# Altium PCB PC110-itx.PcbDoc (part 6 of 16)
Units mm, origin at the board's own origin, x right, y up, seen from the top; angles counter-clockwise.
Board outline 170 x 170 mm, 16 copper layers (FC1, FC2, FC3, FC4, IP1, IC1, IC2, IP2, IP3, IC3, IC4, IP4, BC4, BC3, BC2, BC1), stack 3.903 mm thick; 935 components, 1357 nets, 4698 pads, 3240 vias.
Unrouted connection lines stored in the file: 552.
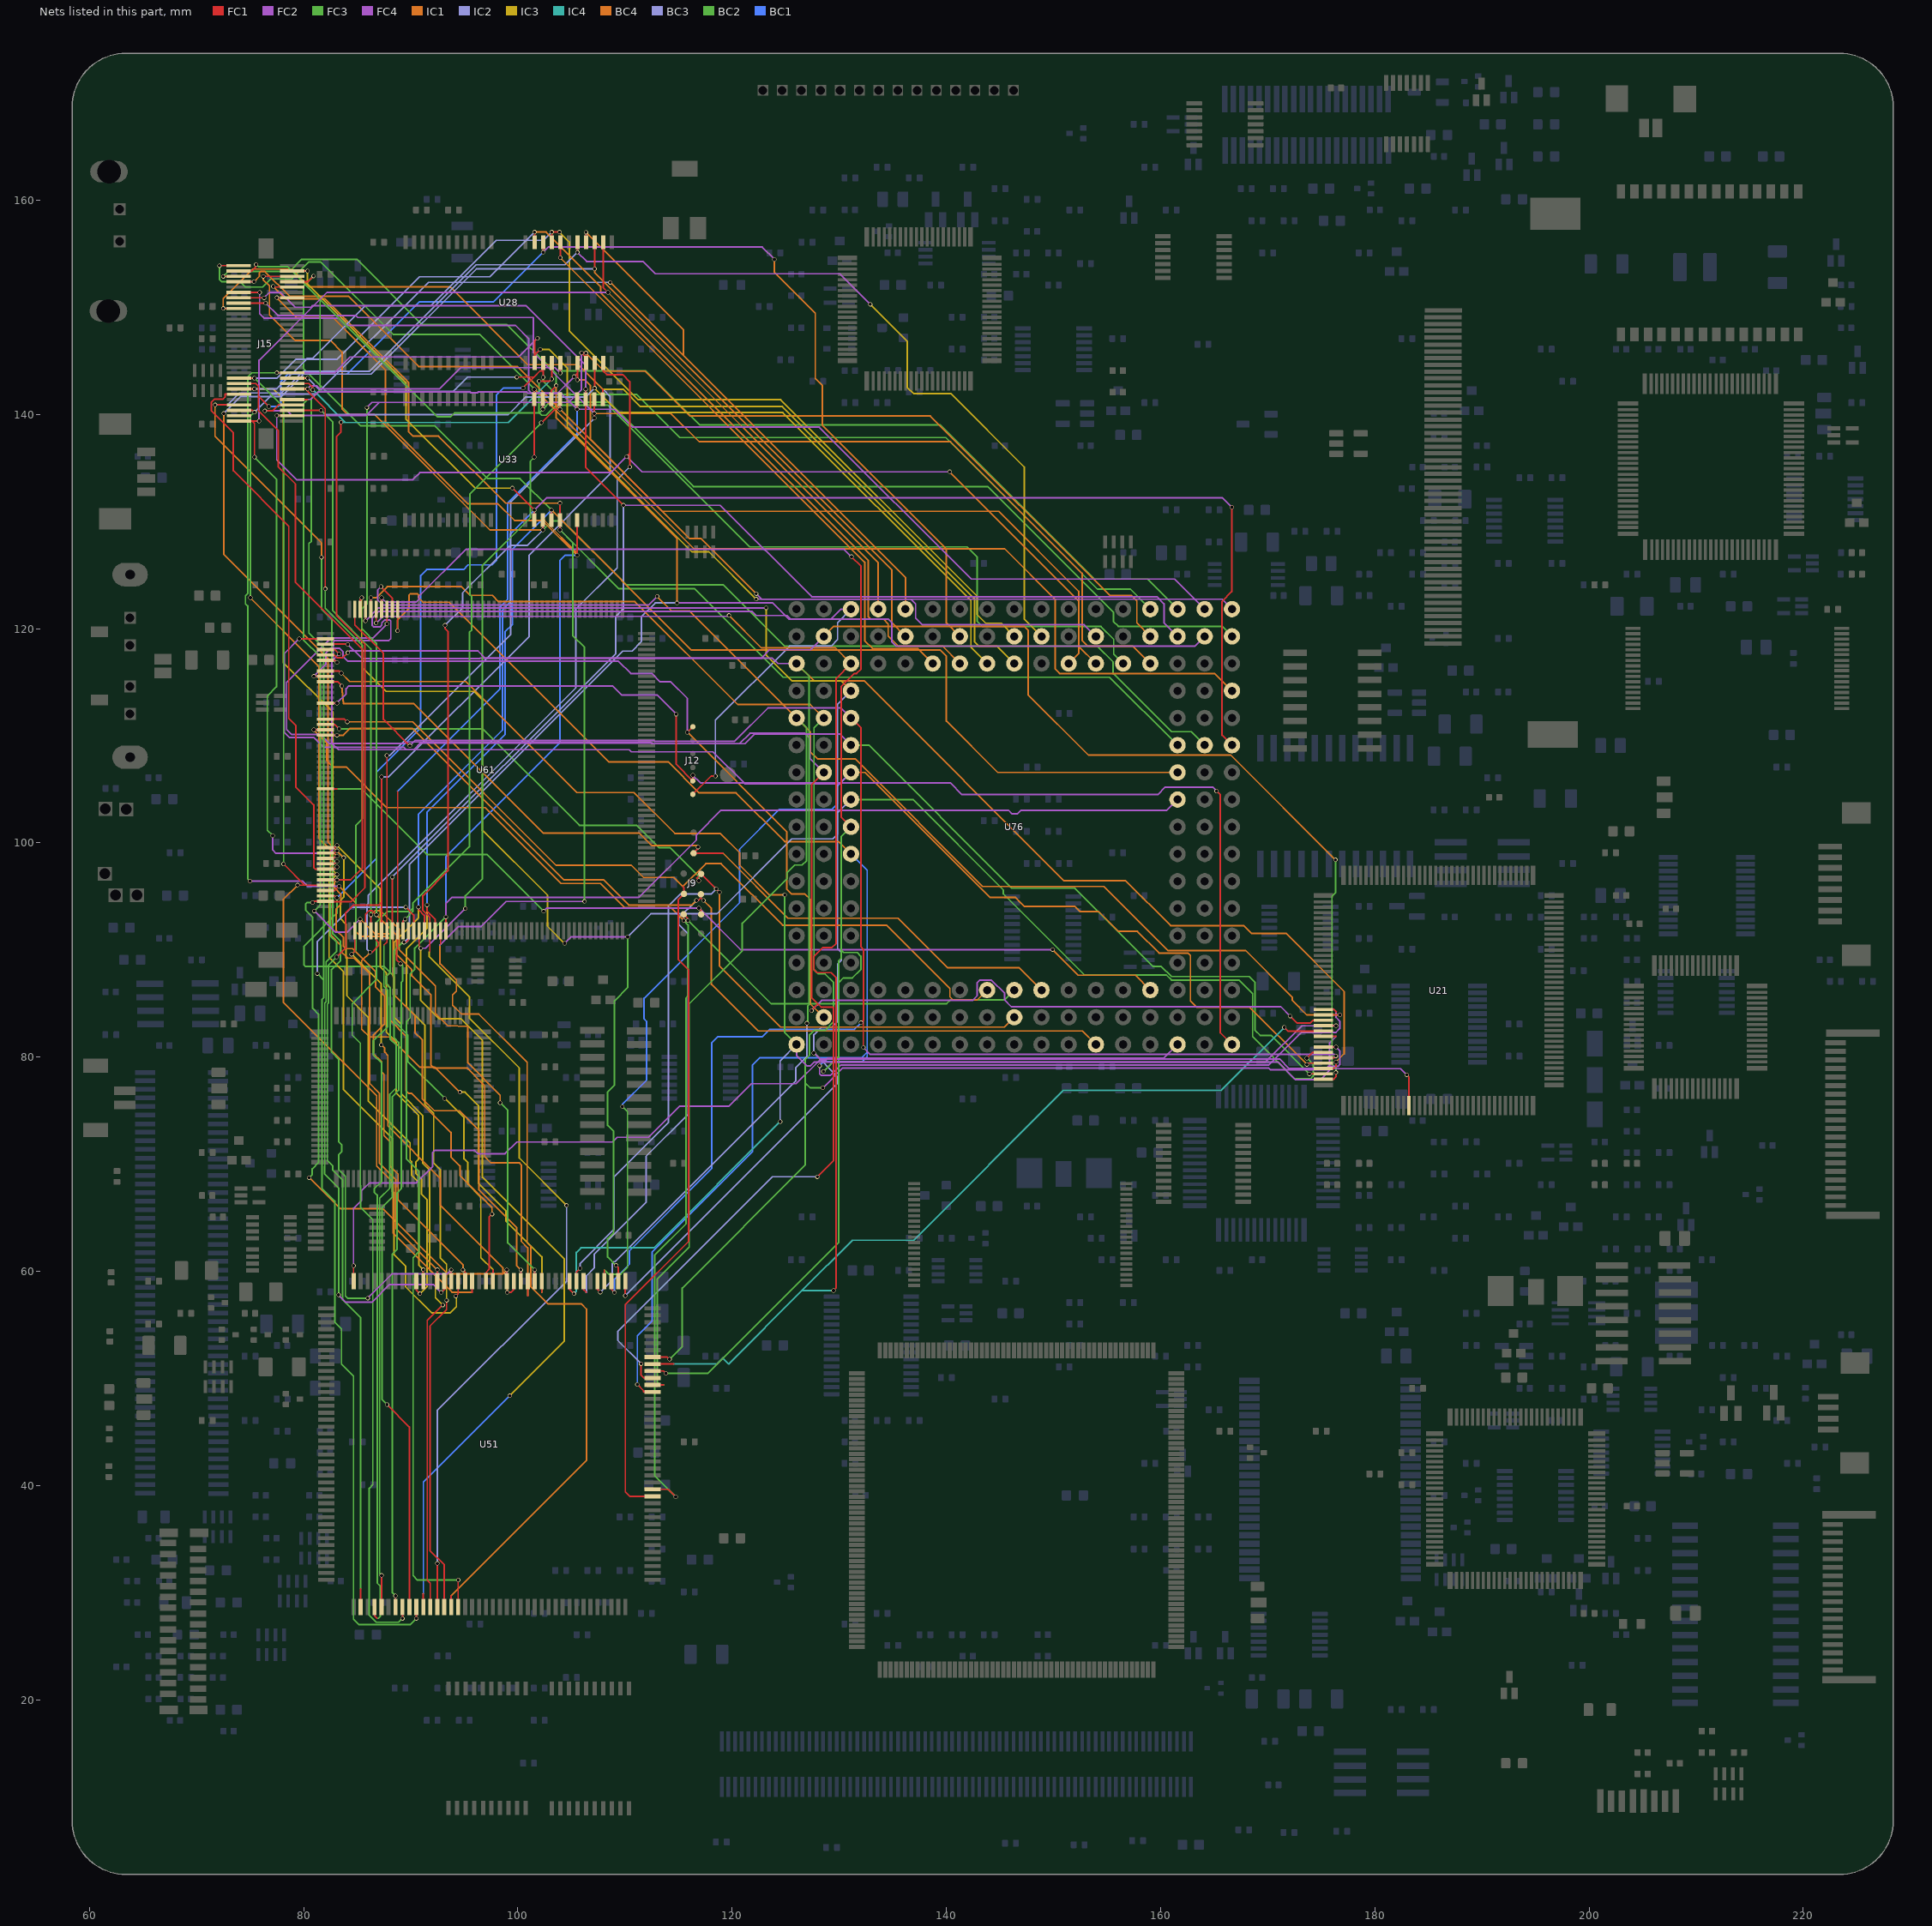
[diagram p19: the nets of this part, all layers, seen from the top]

## Via types
v1: diameter 0.4, hole 0.3, FC1 to BC1, 3240 vias

## Nets (pads, with @x,y where several pads share a name; then routed paths per layer and width w, separated by ;. In a path a pad name is that pad's centre, name@x,y a point inside that pad or via, vN(x,y) a via of type N, cw(c..) or ccw(c..) an arc to the next point about the centre after c; other vN are vias at no path point) (continued)
CPU_A13: U21.22 U51.148 U61.95 U76.Q10 | length 183.1
  FC1 w0.15: v1(88.773,119.812) 88.778,119.817 U61.95@88.778,121.807 ; v1(111.15,49.454) 111.735,48.87 111.735,48.755 U51.148@112.57,48.755 ; U21.22@175.209,84.456 176.199,84.456 176.403,84.252 176.378,84.226
  FC4 w0.15: v1(128.168,79.197) 128.168,78.435 128.295,78.308 129.21,78.308 130.175,79.273 170.098,79.273 173.146,82.321 176.378,82.321 176.733,82.677 176.733,83.363 176.378,83.718 176.378,84.226
  BC4 w0.15: v1(88.773,119.812) 88.773,120.828 89.836,121.891 89.836,123.136 89.941,123.241 90.632,123.241 90.734,123.139 90.734,122.88 91.143,122.471 93.582,122.471 108.484,107.569 114.035,107.569 116.931,104.673 120.371,104.673 124.914,100.13 129.94,100.13 U76.Q10@131.103,98.967
  BC1 w0.15: v1(111.15,49.454) 111.15,53.975 112.547,55.372 112.547,61.824 121.895,71.171 121.895,79.248 122.58,79.934 132.08,79.934 132.613,80.467 ; v1(128.168,79.197) 128.575,79.604 132.156,79.604 132.613,80.061 132.613,80.467 ; U76.Q10@131.103,98.967 132.613,97.457 132.613,80.467
CPU_A14: U21.23 U51.149 U61.96 U76.S5 | length 183.6
  FC1 w0.15: v1(87.225,123.926) 88.278,122.873 U61.96@88.278,121.807 ; U51.149@112.57,49.405 113.612,49.405 ; U21.23@175.182,83.948 v1(176.744,83.948)
  FC3 w0.15: 113.612,49.405 113.614,49.403 113.279,49.403 113.002,49.68 113.002,59.281 116.002,62.281 116.002,84.988 120.955,89.941 120.955,92.507 125.12,96.672 125.12,97.231 125.832,97.942 126.543,97.942 126.949,98.349 126.949,110.741 U76.S5@126.023,111.667
  IC1 w0.15: v1(113.005,123.012) 114.376,121.641 116.049,121.641 U76.S5@126.023,111.667
  FC4 w0.15: v1(87.225,123.926) 86.919,123.62 86.919,122.682 87.376,122.225 112.217,122.225 v1(113.005,123.012)
  BC4 w0.15: U76.S5@126.023,111.667 127.302,110.388 127.302,108.509 127.962,107.848 131.47,107.848 143.383,95.936 154.686,95.936 160.667,89.955 167.932,89.955 172.289,85.597 172.289,85.311 173.652,83.948 v1(176.744,83.948)
CPU_A15: U21.24 U51.150 U61.97 U76.R7 | length 195
  FC1 w0.15: v1(87.778,120.447) U61.97@87.778,121.807 ; v1(111.506,51.384) 111.506,50.309 111.76,50.055 U51.150@112.57,50.055 ; v1(127.406,84.353) 128.016,84.963 ; v1(127.965,68.834) 129.48,70.348 129.48,84.607 129.413,84.674 128.305,84.674 128.016,84.963 ; U76.R7@128.563,106.587 127.415,105.44 127.415,85.564 128.016,84.963 ; v1(172.085,83.845) 172.756,83.175 173.954,83.175 174.22,83.441 U21.24@175.182,83.441
  FC2 w0.15: v1(127.406,84.353) 128.357,85.304 142.439,85.304 142.885,85.75 142.885,86.97 143.1,87.185 144.209,87.185 145.44,85.954 145.44,85.344 146.075,84.709 171.221,84.709 v1(172.085,83.845)
  IC2 w0.15: v1(111.506,51.384) 109.322,53.569 109.322,54.381 123.774,68.834 v1(127.965,68.834)
  FC4 w0.15: v1(87.778,120.447) 86.457,119.125 82.551,119.125 78.41,114.985 78.41,110.592 78.868,110.134 81.534,110.134 82.398,109.271 89.419,109.271 89.571,109.423 112.368,109.423 112.522,109.269 120.699,109.269 121.666,110.236 126.797,110.236 127.279,109.753 127.279,107.871 U76.R7@128.563,106.587
CPU_A16: U21.25 U51.151 U61.98 U76.Q9 | length 201.9
  FC1 w0.15: U61.98@87.278,121.807 v1(87.278,122.885) ; U51.151@112.57,50.705 113.608,50.705 v1(113.817,50.495) ; U76.Q9@131.103,101.507 130.175,102.435 130.175,114.605 131.394,115.824 131.623,115.824 132.029,116.23 132.029,125.832 v1(131.14,126.721) ; U21.25@175.182,82.941 176.368,82.941 v1(176.378,82.931)
  FC3 w0.15: v1(113.817,50.495) 117.754,50.495 129.955,62.696 129.955,86.97 130.377,87.391 131.222,87.391 132.02,88.189 132.02,89.426 131.674,89.772 130.404,89.772 130.175,90.001 ; v1(128.524,78.664) 129.946,80.086 129.946,89.002 130.2,89.256 130.2,89.764 130.175,89.789 130.175,90.001 ; U76.Q9@131.103,101.507 130.175,100.58 130.175,90.001
  FC4 w0.15: v1(87.278,122.885) 87.678,122.485 90.509,122.485 90.757,122.733 90.757,123.015 95.148,127.406 130.455,127.406 v1(131.14,126.721) ; v1(128.524,78.664) 129.413,79.553 169.8,79.553 173.178,82.931 v1(176.378,82.931)
CPU_A17: U21.26 U51.152 U61.99 U76.Q3 | length 189.1
  FC1 w0.15: v1(86.778,120.523) U61.99@86.778,121.807 ; U51.152@112.57,51.355 114.55,51.355 ; v1(129.464,58.217) 129.71,58.463 129.71,87.416 129.235,87.89 127.944,87.89 127.645,88.189 127.645,89.408 128.458,90.221 129.303,90.221 129.71,90.627 129.71,115.355 U76.Q3@131.103,116.747 ; v1(171.552,82.779) 171.889,82.441 U21.26@175.182,82.441
  IC1 w0.15: v1(119.71,121.234) 122.733,118.212 129.638,118.212 U76.Q3@131.103,116.747
  IC4 w0.15: 114.55,51.355 114.554,51.359 118.567,51.359 119.126,51.918 119.685,51.359 126.543,58.217 ; v1(129.464,58.217) 126.543,58.217 ; v1(171.552,82.779) 165.684,76.911 150.952,76.911 136.957,62.916 131.242,62.916 126.543,58.217
  FC4 w0.15: v1(86.778,120.523) 87.413,121.158 119.634,121.158 v1(119.71,121.234)
CPU_A18: U21.27 U51.153 U61.100 U76.R5 | length 173.3
  FC1 w0.15: U61.100@86.278,121.807 86.278,122.879 v1(86.284,122.885) ; U51.153@112.57,52.005 113.956,52.005 v1(114.159,51.802) ; U21.27@175.182,81.941 176.377,81.941
  FC3 w0.15: v1(114.159,51.802) 115.341,52.984 115.341,58.445 126.823,69.927 126.823,77.622 ; v1(128.473,77.14) 127.305,77.14 126.823,77.622 ; U76.R5@128.563,111.667 127.645,110.75 127.645,88.189 128.052,87.782 128.667,87.782 129.48,86.97 129.48,83.312 128.673,82.506 127.641,82.506 127.229,82.093 127.229,80.187 126.823,79.781 126.823,77.622
  FC4 w0.15: v1(128.473,77.14) 130.327,78.994 170.078,78.994 170.256,78.816 175.578,78.816 175.778,79.016 175.778,81.341 176.377,81.94
  BC4 w0.15: v1(86.284,122.885) 86.766,122.885 87.808,123.927 94.742,123.927 95.555,123.114 97.612,123.114 98.196,122.53 110.922,122.53 120.523,112.928 127.302,112.928 U76.R5@128.563,111.667
CPU_A19: U21.29 U51.1 U61.101 U76.Q4 | length 174.8
  FC1 w0.15: v1(85.776,120.726) 85.778,120.728 U61.101@85.778,121.807 ; v1(110.025,57.733) U51.1@110.025,59.1 ; U21.29@175.182,80.941 v1(176.386,80.941)
  FC2 w0.15: v1(127.635,80.391) 128.194,79.832 171.12,79.832 172.009,78.943 175.477,78.943 175.693,79.159 176.581,79.159 176.733,79.311 176.733,80.594 v1(176.386,80.941)
  IC3 w0.15: v1(123.19,121.945) 123.19,117.523 125.578,115.135 130.175,115.135 U76.Q4@131.103,114.207
  FC4 w0.15: v1(85.776,120.726) 86.995,121.945 v1(123.19,121.945)
  BC3 w0.15: v1(110.025,57.733) 129.845,77.553 129.845,78.181 v1(127.635,80.391) 127.635,82.093 128.346,82.804 129.337,82.804 129.845,83.312 129.845,88.698 130.2,89.053 130.2,89.772 129.845,90.127 129.845,112.95 U76.Q4@131.103,114.207
CPU_A20: U21.30 U51.2 U61.102 U76.Q8 | length 173.6
  FC1 w0.15: U61.102@85.278,121.807 85.278,122.743 v1(85.42,122.885) ; v1(109.169,60.554) 109.375,60.348 U51.2@109.375,59.1 ; v1(173.66,79.908) 174.192,80.441 U21.30@175.182,80.441
  FC2 w0.15: v1(104.369,90.627) 104.978,91.237 v1(110.261,91.237)
  FC3 w0.15: v1(109.169,60.554) 108.382,61.34 108.382,63.043 108.941,63.602 108.941,73.076 108.382,73.635 108.382,76.759 109.017,77.394 109.017,85.268 110.261,86.512 v1(110.261,91.237)
  IC2 w0.15: v1(110.261,91.237) 112.42,93.396 118.593,93.396 125.578,100.381 129.417,100.381 129.823,100.787 129.823,102.768 U76.Q8@131.103,104.047
  IC3 w0.15: v1(85.42,122.885) 85.42,116.434 87.706,114.148 95.91,114.148 96.672,113.386 96.672,101.219 102.768,95.124 102.768,92.228 v1(104.369,90.627)
  BC2 w0.15: U76.Q8@131.103,104.047 136.886,104.047 145.316,95.617 145.316,95.247 152.882,87.681 160.527,87.681 161.011,87.198 167.323,87.198 168.593,85.928 168.593,81.915 172.53,77.978 173.99,77.978 174.244,78.232 174.244,79.324 v1(173.66,79.908)
CPU_A20M#: J9.7 U61.134 U76.D15 | length 85.7
  FC1 w0.15: U61.134@82.028,105.057 83.106,105.057 ; v1(116.904,93.919) 117.107,93.716 J9.7@117.107,93.339
  FC2 w0.15: v1(102.413,93.624) 102.707,93.919 v1(116.904,93.919)
  IC1 w0.15: v1(149.911,90.043) 152.298,87.655 157.655,87.655 U76.D15@159.043,86.267
  FC4 w0.15: v1(116.904,93.919) 120.78,90.043 v1(149.911,90.043)
  BC2 w0.15: 83.106,105.057 83.109,105.054 85.369,105.054 91.491,98.933 97.104,98.933 v1(102.413,93.624)
CPU_A21: U21.31 U51.3 U61.103 U76.Q5 | length 178.2
  FC1 w0.15: U61.103@84.778,121.807 84.778,120.371 87.452,117.696 87.452,111.531 v1(89.916,109.068) ; U51.3@108.725,59.1 108.725,58.331 v1(109.017,58.039) ; U76.Q5@131.103,111.667 132.029,110.741 132.029,90.297 132.258,90.068 132.258,83.439 132.25,83.431 ; v1(132.029,83.21) 132.25,83.431 ; v1(132.25,80.907) 132.25,83.21 132.25,83.431 ; U21.31@175.182,79.941 176.182,79.941 v1(176.365,80.124)
  FC2 w0.15: v1(89.916,109.068) 90.424,109.576 112.676,109.576 112.752,109.499 120.243,109.499 123.342,112.598 130.172,112.598 U76.Q5@131.103,111.667 ; v1(132.25,80.907) 132.893,80.264 176.225,80.264 v1(176.365,80.124)
  BC1 w0.15: v1(109.017,58.039) 109.017,59.284 110.414,60.681 110.414,61.925 118.085,69.596 118.085,81.331 118.669,81.915 122.834,81.915 123.52,82.601 131.42,82.601 v1(132.029,83.21)
CPU_A22: U21.32 U51.4 U61.106 U76.Q7 | length 187
  FC1 w0.15: v1(79.585,119.057) U61.106@82.028,119.057 ; U51.4@108.075,59.1 108.075,60.145 ; v1(173.66,79.324) 173.777,79.441 U21.32@175.182,79.441
  FC3 w0.15: 108.075,60.145 108.077,60.147 108.483,59.741 109.601,59.741 110.236,60.376 110.236,74.905 v1(109.753,75.387)
  FC4 w0.15: v1(79.585,119.057) 78.18,117.652 78.18,110.338 78.663,109.855 80.95,109.855 81.89,108.915 89.362,108.915 89.571,108.705 110.395,108.705 110.592,108.509 118.216,108.509 121.188,105.537 130.052,105.537 U76.Q7@131.103,106.587
  BC4 w0.15: U76.Q7@131.103,106.587 132.406,106.587 144.073,94.921 146.43,94.921 147.269,94.082 151.994,94.082 152.476,93.599 154.203,93.599 156.058,91.745 157.836,91.745 159.856,89.725 162.56,89.725 162.789,89.496 162.789,85.242 163.373,84.658 168.326,84.658 v1(173.66,79.324)
  BC1 w0.15: v1(109.753,75.387) 109.753,75.59 112.014,77.851 112.014,83.338 111.786,83.566 111.786,85.497 120.7,94.411 120.7,99.415 124.409,103.124 129.315,103.124 129.823,103.632 129.823,105.308 U76.Q7@131.103,106.587
CPU_A23: U21.33 U51.5 U61.107 U76.S3 | length 185.6
  FC1 w0.15: U61.107@82.028,118.557 84.095,118.557 v1(84.112,118.54) ; U51.5@107.425,59.1 107.425,58.318 107.442,58.318 v1(107.696,58.064) ; U21.33@175.182,78.941 176.172,78.941 176.378,79.146 v1(176.378,79.553)
  FC3 w0.15: U76.S3@126.023,116.747 127.185,115.585 127.185,84.894 127.051,84.76 127.051,83.237 v1(126.993,83.178)
  FC4 w0.15: v1(84.112,118.54) 85.44,117.212 96.453,117.212 96.487,117.246 123.766,117.246 124.265,116.747 U76.S3@126.023,116.747
  BC4 w0.15: U76.S3@126.023,116.747 127.635,115.135 132.312,115.135 150.978,96.469 156.743,96.469 160.934,92.278 167.767,92.278 168.478,91.567 171.704,91.567 177.137,86.134 177.137,80.312 v1(176.378,79.553)
  BC3 w0.15: v1(107.696,58.064) 108.814,59.183 108.814,60.757 108.966,60.909 109.067,60.909 125.931,77.773 125.931,79.017 126.993,80.078 v1(126.993,83.178)
CPU_A24: U21.34 U61.108 U76.Q6 | length 119.3
  FC1 w0.15: U61.108@82.028,118.057 82.906,118.057 v1(83.312,117.651) ; v1(173.888,78.441) U21.34@175.182,78.441
  FC2 w0.15: v1(83.312,117.651) 82.626,116.965 82.626,109.322 83.242,108.705 90.281,108.705 90.909,109.333 112.522,109.333 112.587,109.269 121.207,109.269 122.098,110.16 130.07,110.16 U76.Q6@131.103,109.127
  BC2 w0.15: U76.Q6@131.103,109.127 132.757,109.127 146.101,95.783 151.994,95.783 159.309,88.468 160.071,88.468 161.011,87.528 168.264,87.528 168.823,86.97 168.823,82.499 169.292,82.031 170.299,82.031 v1(173.888,78.441)
CPU_A25: U21.35 U61.109 U76.R2 | length 130.6
  FC1 w0.15: U61.109@82.028,117.557 82.847,117.557 83.109,117.296 83.672,117.296 v1(84.131,117.754) ; U21.35@175.182,77.941 176.14,77.941 176.366,78.167 v1(176.366,78.574)
  FC2 w0.15: v1(84.131,117.754) 84.308,117.932 96.275,117.932 96.96,117.247 122.708,117.247 123.495,118.034 127.309,118.034 U76.R2@128.563,119.287
  FC3 w0.15: v1(176.327,98.425) 176.327,95.352 175.997,95.021 175.997,79.35 176.366,78.98 v1(176.366,78.574)
  BC4 w0.15: U76.R2@128.563,119.287 129.493,120.218 147.269,120.218 147.625,119.863 147.625,113.843 153.264,108.204 166.548,108.204 v1(176.327,98.425)
CPU_A31: J12.6 U61.110 U76.Q1 | length 84.8
  FC1 w0.15: U61.110@82.028,117.057 82.906,117.057 v1(83.109,116.854) ; J12.6@116.332,104.541 118.034,106.243 v1(118.44,106.243)
  FC4 w0.15: v1(83.109,116.854) 82.781,117.182 82.781,118.77 82.906,118.895 87.958,118.895 88.138,119.075 88.138,120.701 88.011,120.828 87.579,120.828 87.3,120.548 87.3,120.345 87.122,120.167 86.538,120.167 86.411,120.294 86.411,121.006 87.02,121.615 121.844,121.615 122.225,121.234 125.12,121.234 125.444,120.91 129.235,120.91 130.152,121.827 U76.Q1@131.103,121.827
  BC3 w0.15: v1(118.44,106.243) 118.44,111.455 125.349,118.364 129.235,118.364 129.845,118.974 129.845,120.57 U76.Q1@131.103,121.827
CPU_ADS#: U21.49 U51.9 U61.112 U76.S17 | length 166.7
  FC1 w0.15: U61.112@82.028,116.057 83.308,116.057 v1(83.515,115.849) ; U51.9@104.825,59.1 104.825,58.319 v1(105.232,57.912) ; v1(182.979,78.359) 183.182,78.156 U21.49@183.182,75.491
  FC2 w0.15: U76.S17@126.023,81.187 126.023,80.15 126.975,79.198 127.33,79.198 127.685,79.553 170.942,79.553 172.594,77.901 174.908,77.901 175.935,78.929 182.409,78.929 v1(182.979,78.359)
  FC3 w0.15: v1(124.917,95.148) 124.917,82.293 U76.S17@126.023,81.187
  IC2 w0.15: v1(124.485,73.99) 124.485,79.65 U76.S17@126.023,81.187
  IC4 w0.15: v1(105.232,57.912) 105.461,58.141 105.461,61.773 105.893,62.205 112.7,62.205 v1(124.485,73.99)
  BC4 w0.15: v1(83.515,115.849) 84.296,115.069 95.141,115.069 105.512,104.699 110.846,104.699 114.656,100.889 118.897,100.889 120.7,99.086 120.7,97.943 123.495,95.148 v1(124.917,95.148)
CPU_AHOLD: J12.5 U61.118 U76.A17 | length 116.5
  FC1 w0.15: U61.118@82.028,113.057 v1(83.109,113.057) ; v1(114.783,112.026) 114.783,107.34 J12.5@116.332,105.791 v1(116.332,106.321) ; v1(165.227,104.851) 165.583,104.496 165.583,82.267 U76.A17@166.663,81.187
  FC2 w0.15: v1(83.109,113.057) 83.971,113.919 83.971,114.402 84.222,114.652 108.842,114.652 109.677,113.817 112.991,113.817 v1(114.783,112.026) ; v1(116.332,106.321) 117.04,105.613 140.36,105.613 141.453,104.521 159.739,104.521 160.424,105.206 164.872,105.206 v1(165.227,104.851)
CPU_BE0#: J9.6 U51.133 U61.121 U76.K15 | length 137.6
  FC1 w0.15: U61.121@82.028,111.557 83.82,111.557 v1(84.074,111.303) ; U51.133@112.57,39.005 110.449,39.005 110.033,39.421 110.033,56.896 115.951,62.814 115.951,88.138 114.986,89.103 114.986,94.718 J9.6@115.507,95.239 115.507,95.819 115.404,95.922
  BC4 w0.15: v1(84.074,111.303) 90.169,111.303 103.556,97.917 110.592,97.917 111.735,96.774 114.552,96.774 115.404,95.922 117.551,98.069 118.974,98.069 124.714,92.329 134.417,92.329 140.335,86.411 140.335,85.63 140.614,85.35 142.885,85.35 U76.K15@143.803,86.267
CPU_BE1#: J9.3 U51.8 U61.122 U76.J16 | length 125.3
  FC1 w0.15: U61.122@82.028,111.057 82.906,111.057 v1(83.32,110.642) ; U51.8@105.475,59.1 105.475,59.944 v1(105.816,60.285) ; v1(116.904,96.469) 116.71,96.717 J9.3@117.107,97.114 v1(118.511,95.71) v1(118.821,95.4)
  BC2 w0.15: v1(83.32,110.642) 96.749,110.642 105.74,101.651 111.074,101.651 113.157,99.568 114.178,99.568 116.904,96.842 v1(116.904,96.469)
  BC4 w0.15: v1(118.821,95.4) 118.821,88.494 124.504,82.81 145.425,82.81 U76.J16@146.343,83.727
  BC3 w0.15: v1(105.816,60.285) 105.816,60.756 108.967,63.906 108.967,68.808 114.047,73.889 114.047,94.108 115.164,95.225 118.026,95.225 v1(118.511,95.71)
CPU_BE2#: J9.8 U51.134 U61.123 U76.J15 | length 138
  FC1 w0.15: v1(80.95,110.557) U61.123@82.028,110.557 ; U51.134@112.57,39.655 114.04,39.655 v1(114.732,38.964) ; v1@115.482,92.761 J9.8@115.482,93.339 115.875,92.946 v1(115.875,92.761)
  FC3 w0.15: v1(114.732,38.964) 112.772,40.923 112.772,61.515 115.697,64.44 115.697,85.526 115.888,85.717 115.888,92.353 v1(115.482,92.759)
  BC2 w0.15: v1(115.875,92.761) 123.647,84.988 140.03,84.988 140.386,85.344 145.419,85.344 U76.J15@146.343,86.267
  BC4 w0.15: v1(80.95,110.557) 82.144,109.363 82.144,107.696 82.753,107.086 83.972,107.086 87.757,103.302 96.926,103.302 104.013,96.215 107.72,96.215 109.956,93.979 114.264,93.979 115.482,92.761 v1(115.482,92.759)
CPU_BE3#: J9.5 U51.7 U61.124 U76.F17 | length 132.2
  FC1 w0.15: U61.124@82.028,110.057 v1(83.109,110.057) ; U51.7@106.125,59.1 106.125,58.318 106.379,58.064 ; v1(116.676,94.634) 116.84,94.634 117.082,94.876 ; J9.5@117.082,95.214 117.082,94.876 ; v1(117.323,94.635) 117.082,94.876
  BC4 w0.15: v1(83.109,110.057) 83.706,110.057 84.342,110.693 90.145,110.693 104.267,96.571 107.976,96.571 110.338,94.209 116.251,94.209 v1(116.676,94.634) ; v1(117.323,94.635) 118.072,93.886 118.072,86.805 122.428,82.448 152.702,82.448 U76.F17@153.963,81.187
  BC3 w0.15: 106.379,58.064 106.426,58.064 106.426,59.614 107.13,60.318 107.13,61.609 111.963,66.443 111.963,70.739 115.875,74.651 115.875,91.547 115.011,92.411 115.011,92.97 v1(116.676,94.634)
CPU_BLAST#: J12.1 U61.113 U76.R16 | length 76.3
  FC1 w0.15: v1(80.95,115.557) U61.113@82.028,115.557 ; v1(115.824,110.333) J12.1@116.332,110.841
  FC2 w0.15: v1(80.95,115.557) 82.067,116.675 82.067,117.729 82.499,118.161 83.362,118.161 83.667,117.856 83.667,117.425 84.125,116.967 109.398,116.967 110.541,115.824 112.497,115.824 113.284,115.037 114.275,115.037 115.824,113.487 v1(115.824,110.333)
  IC1 w0.15: v1(115.824,110.333) 125.095,101.062 125.095,95.707 125.578,95.225 126.797,95.225 127.305,94.717 127.305,84.985 U76.R16@128.563,83.727
CPU_BRDY#: J9.2 U61.114 U76.H15 | length 80.5
  FC1 w0.15: U61.114@82.028,115.057 83.16,115.057 v1(83.566,114.651) ; v1(116.815,99.619) 116.815,99.447 J9.2@116.407,99.039 119.147,99.039
  BC4 w0.15: v1(83.566,114.651) 83.718,113.005 90.296,113.005 102.396,100.905 111.337,100.905 112.498,99.744 116.689,99.744 v1(116.815,99.619) ; 119.147,99.039 125.216,92.97 135.503,92.97 140.106,88.367 146.783,88.367 U76.H15@148.883,86.267
CPU_BS16#: U51.40 U76.C17 | length 91.6
  FC1 w0.15: v1(84.659,60.529) 84.659,59.808 U51.40@84.675,59.1
  FC4 w0.15: v1(84.659,60.529) 84.659,65.863 85.389,66.593 85.389,67.501 86.157,68.269 90.519,68.269 92.05,69.799 92.05,71.12 92.228,71.298 95.964,71.298 96.269,70.993 98.797,70.993 99.889,72.085 108.839,72.085 109.271,72.517 112.192,72.517 115.087,75.413 119.685,75.413 121.793,77.521 125.969,77.521 128.145,79.697 128.719,79.697 128.93,79.908 160.303,79.908 U76.C17@161.583,81.187
CPU_D0: J15.1 U28.2 U51.31 U61.145 U76.P1 | length 183.9
  FC1 w0.15: J15.1@73.977,139.393 75.184,139.393 ; v1(75.413,136.017) 75.413,139.164 75.184,139.393 ; v1(75.844,139.393) 75.184,139.393 ; U61.145@82.028,99.557 82.895,99.557 v1(83.109,99.771) ; U51.31@90.525,59.1 90.525,58.243 v1(90.856,57.912) ; U28.2@107.958,156.082 107.958,151.848 v1(108.412,151.393)
  FC2 w0.15: v1(75.844,139.393) 75.844,145.059 82.178,151.393 v1(108.412,151.393) ; v1(77.114,100.686) 77.114,99.339 77.419,99.035 82.372,99.035 v1(83.109,99.771)
  FC3 w0.15: v1(75.413,136.017) 77.47,133.96 77.47,114.579 76.607,113.716 76.607,101.193 v1(77.114,100.686)
  IC1 w0.15: v1(108.412,151.393) 133.643,126.163 U76.P1@133.643,121.827
  IC3 w0.15: v1(83.109,99.771) 87.147,95.733 87.147,88.443 87.732,87.858 87.732,82.344 88.648,81.428 88.648,76.63 90.729,74.549 90.729,70.485 90.488,70.244 90.488,69.125 91.008,68.605 91.008,67.208 91.53,66.687 91.53,58.586 v1(90.856,57.912)
CPU_D1: J15.2 U28.3 U51.30 U61.146 U76.N2 | length 180
  FC1 w0.15: U61.146@82.028,99.057 82.903,99.057 v1(83.109,99.263) ; U51.30@91.175,59.1 v1(91.175,60.158) ; v1(107.158,153.594) U28.3@107.158,156.082
  IC1 w0.15: v1(72.547,140.096) 72.547,126.97 82.271,117.246 82.271,100.101 v1(83.109,99.263) v1(83.744,98.628) ; v1(107.158,153.594) 107.158,153.243 134.925,125.476 134.925,120.545 U76.N2@136.183,119.287
  IC2 w0.15: v1(72.547,140.096) 74.108,141.656 77.902,141.656 80.01,143.764 86.309,143.764 96.139,153.594 v1(107.158,153.594)
  IC3 w0.15: v1(83.109,99.263) v1(83.744,98.628) 83.744,94.944 83.44,94.64 83.44,92.937 83.946,92.43 83.946,89.282 84.023,89.205 84.023,85.75 86.03,83.744 86.03,75.921 89.942,72.008 89.942,70.374 90.094,70.222 90.094,68.961 90.754,68.301 90.754,60.579 v1(91.175,60.158)
CPU_D2: J15.3 U28.4 U51.28 U61.147 U76.N1 | length 188.7
  FC1 w0.15: J15.3@73.977,140.393 75.228,140.393 v1(75.413,140.208) ; U61.147@82.028,98.557 82.754,98.557 v1(83.109,98.76) ; U51.28@92.475,59.1 v1(92.475,60.154) ; U28.4@106.358,156.082 v1(106.358,157.013)
  FC3 w0.15: v1(75.032,122.885) 75.032,139.827 v1(75.413,140.208)
  IC1 w0.15: v1(75.032,122.885) 81.432,116.484 81.432,100.437 82.524,99.345 ; v1(83.109,98.76) 82.524,99.345 ; v1(92.475,60.154) 88.594,64.034 88.594,68.581 87.071,70.105 87.071,76.632 86.157,77.546 86.157,87.782 84.683,89.256 84.125,89.256 83.472,89.909 83.472,90.467 82.524,91.415 82.524,99.345 ; v1(106.358,157.013) 115.468,147.902 115.468,145.491 ; v1(108.628,152.332) 115.468,145.491 ; U76.N1@136.183,121.827 136.183,124.777 115.468,145.491
  BC3 w0.15: v1(75.413,140.208) 77.123,141.918 81.231,141.918 91.644,152.332 v1(108.628,152.332)
CPU_D3: J15.4 U28.5 U51.27 U61.148 U76.H2 | length 214.6
  FC1 w0.15: v1@71.731,140.892 J15.4@73.977,140.892 ; U61.148@82.028,98.057 82.893,98.057 v1(83.109,98.273) ; v1(92.837,58.039) 93.125,58.327 U51.27@93.125,59.1 ; v1(105.558,155.143) U28.5@105.558,156.082
  FC2 w0.15: v1(83.261,57.81) 83.947,57.125 86.385,57.125 88.036,58.776 92.1,58.776 v1(92.837,58.039)
  FC3 w0.15: v1(81.661,126.67) 81.661,121.824 82.636,120.849 82.636,98.504 82.88,98.26 v1(83.109,98.273) 82.474,97.638 82.474,91.338 83.083,90.729 83.083,89.891 82.094,88.901 82.094,85.18 81.978,85.065 81.978,69.824 81.941,69.787 81.941,69.113 83.261,67.793 v1(83.261,57.81)
  IC2 w0.15: v1@71.731,140.892 v1(71.73,140.894) 72.898,140.894 74.016,142.011 77.922,142.011 79.929,144.018 86.131,144.018 96.088,153.975 104.389,153.975 v1(105.558,155.143)
  IC3 w0.15: v1(132.893,150.292) 136.347,146.837 136.347,142.545 136.957,141.935 140.437,141.935 147.269,135.103 147.269,120.901 U76.H2@148.883,119.287
  FC4 w0.15: v1(105.558,155.143) 106.421,154.28 111.684,154.28 112.828,153.136 130.049,153.136 v1(132.893,150.292)
  BC4 w0.15: v1(71.73,140.894) 71.73,137.973 81.661,128.041 v1(81.661,126.67)
CPU_D4: J15.6 U28.7 U51.26 U61.149 U76.M3 | length 162.7
  FC1 w0.15: J15.6@73.977,141.892 72.669,141.892 72.669,141.63 72.479,141.44 71.692,141.44 71.375,141.122 71.375,140.36 73.431,138.303 73.431,134.747 78.613,129.565 78.613,111.633 79.267,110.979 79.267,105.237 80.95,103.555 80.95,97.684 81.077,97.557 U61.149@82.028,97.557 82.906,97.557 v1(83.109,97.76) ; U51.26@93.775,59.1 93.775,60.145 v1(93.777,60.147) ; v1(103.958,154.635) U28.7@103.958,156.082
  FC2 w0.15: v1(85.979,57.506) 88.24,59.766 93.396,59.766 v1(93.777,60.147)
  FC3 w0.15: v1(83.109,97.76) 82.728,97.379 82.728,91.516 83.438,90.805 83.438,89.027 82.601,88.189 82.601,80.467 83.287,79.781 83.287,72.097 83.565,71.818 83.565,71.184 83.287,70.905 83.287,69.494 83.895,68.886 83.895,57.709 84.099,57.506 v1(85.979,57.506)
  IC1 w0.15: v1(103.958,154.635) 132.385,126.208 132.385,118.872 133.116,118.14 137.33,118.14 U76.M3@138.723,116.747
CPU_D5: J15.7 U28.8 U51.25 U61.150 U76.J2 | length 201.7
  FC1 w0.15: J15.7@73.977,142.393 v1(75.408,142.393) ; U61.150@82.028,97.057 v1(83.109,97.057) ; v1(94.209,57.709) 94.425,57.925 U51.25@94.425,59.1 ; U28.8@103.157,156.082 v1(103.157,157.023) v1(103.886,157.023)
  IC2 w0.15: v1(75.408,142.393) 77.486,142.393 80.32,145.226 80.811,145.226 85.725,150.139 91.846,150.139 97.968,156.261 102.395,156.261 v1(103.157,157.023)
  IC3 w0.15: v1(75.408,142.393) 77.14,142.393 78.105,141.427 78.105,116.84 82.728,112.217 82.728,97.438 v1(83.109,97.057) 82.372,96.32 82.372,89.332 83.718,87.986 83.718,76.962 88.29,72.39 88.29,67.462 88.443,67.31 88.443,61.57 89.51,60.503 89.51,58.572 91.948,56.134 93.7,56.134 94.259,56.693 94.259,57.659 v1(94.209,57.709) ; v1(103.886,157.023) 104.8,156.108 104.8,147.803 111.227,141.376 124.536,141.376 142.875,123.038 142.875,121.31 143.675,120.51 145.12,120.51 U76.J2@146.343,119.287
CPU_D6: J15.8 U28.9 U51.24 U61.151 U76.L2 | length 198.8
  FC1 w0.15: J15.8@73.977,142.893 75.522,142.893 75.768,142.646 75.768,141.732 ; v1(76.759,140.741) 75.768,141.732 ; U61.151@82.028,96.557 v1@83.097,96.557 ; v1(83.109,96.545) v1@83.097,96.557 ; v1(94.869,60.147) 95.075,59.941 U51.24@95.075,59.1 ; v1@102.357,155.148 U28.9@102.357,156.082 ; 75.768,141.732 75.768,140.36 77.622,138.506 77.622,135.128 79.248,133.502 79.248,124.322 85.488,118.082 85.488,97.651 84.394,96.557 83.109,96.557 v1@83.097,96.557
  IC1 w0.15: v1(83.109,96.545) 82.883,96.319 82.883,95.806 83.464,95.225 83.464,94.259 83.033,93.828 83.033,91.846 83.718,91.161 83.718,90.338 83.922,90.135 84.566,90.135 86.729,87.973 86.729,86.538 87.554,85.713 87.554,83.083 86.515,82.045 86.515,80.332 87.281,79.566 87.281,78.606 87.499,78.388 87.499,72.673 88.057,72.116 88.057,69.83 88.824,69.062 88.824,66.674 94.869,60.63 v1(94.869,60.147) ; v1(123.952,154.483) 123.952,153.264 127.762,149.454 127.762,143.383 128.422,142.723 128.422,139.014 140.005,127.432 140.005,120.545 U76.L2@141.263,119.287
  FC4 w0.15: v1@102.357,155.148 v1(102.362,155.143) 102.845,155.626 122.809,155.626 v1(123.952,154.483)
  BC1 w0.15: v1(76.759,140.741) 77.622,140.741 77.876,140.995 77.876,143.104 78.537,143.764 84.074,143.764 90.83,150.52 97.739,150.52 v1(102.362,155.143)
CPU_D7: J15.9 U28.10 U51.23 U61.152 U76.L3 | length 194.5
  FC1 w0.15: J15.9@73.977,143.392 v1(75.408,143.392) ; v1(78.13,98.038) 80.112,96.057 ; v1(79.44,96.057) 80.112,96.057 ; U61.152@82.028,96.057 80.112,96.057 ; 95.725,58.054 U51.23@95.725,59.1 ; U28.10@101.557,156.082 v1@101.557,157.015
  FC3 w0.15: v1(75.408,143.392) 78.13,140.67 v1(78.13,98.038)
  IC1 w0.15: v1(79.44,96.057) 78.105,94.722 78.105,85.115 86.817,76.403 86.817,69.825 88.364,68.277 88.364,63.553 93.853,58.064 95.715,58.064 95.725,58.054 ; v1@101.557,157.015 v1(101.549,157.023) 102.641,157.023 107.721,151.943 107.721,151.359 132.715,126.365 132.715,121.107 132.918,120.904 134.112,120.904 134.569,120.447 134.569,119.329 135.528,118.37 139.64,118.37 U76.L3@141.263,116.747
  BC3 w0.15: v1(75.408,143.392) 77.53,143.392 79.292,145.154 83.127,145.154 90.83,152.857 97.384,152.857 v1(101.549,157.023)
CPU_D8: J15.51 U28.35 U51.21 U61.153 U76.F2 | length 202.3
  FC1 w0.15: v1(77.497,143.893) J15.51@78.928,143.893 ; U61.153@82.028,95.557 82.906,95.557 v1(83.312,95.963) ; U51.21@97.025,59.1 97.025,59.893 97.32,60.188 97.32,65.087 v1(97.587,65.354) ; U28.35@101.557,144.807 101.557,145.537 ; v1(101.829,147.117) 101.557,146.846 101.557,145.537 ; v1(102.094,146.073) 101.557,145.537
  FC2 w0.15: v1(74.981,96.444) 79.883,96.444 80.363,95.963 v1(83.312,95.963) ; v1(77.497,143.893) 82.882,143.893 84.353,145.364 100.076,145.364 v1(101.829,147.117) ; v1(122.25,122.758) 136.677,122.758 137.135,122.301 137.135,121.006 137.77,120.371 152.879,120.371 U76.F2@153.963,119.287
  FC3 w0.15: v1(74.981,96.444) 74.778,96.647 74.778,122.123 74.574,122.326 74.574,123.088 74.778,123.292 74.778,143.485 75.186,143.893 v1(77.497,143.893)
  IC1 w0.15: v1(83.312,95.963) 84.861,94.414 84.861,91.745 85.344,91.262 87.828,91.262 88.087,91.003 88.087,87.908 87.732,87.553 87.732,86.837 88.087,86.482 88.087,83.438 89.552,81.973 89.552,76.884 89.814,76.622 90.104,76.622 93.751,72.974 93.751,70.688 94.59,69.85 94.59,68.961 97.587,65.964 v1(97.587,65.354)
  IC3 w0.15: v1(102.094,146.073) 102.898,146.073 104.597,144.374 104.597,138.836 116.256,127.178 117.831,127.178 v1(122.25,122.758)
CPU_D9: J15.52 U28.36 U51.20 U61.154 U76.D1 | length 202.4
  FC1 w0.15: J15.52@78.928,143.392 v1(80.366,143.392) ; U61.154@82.028,95.057 82.921,95.057 v1(83.109,94.869) ; U51.20@97.675,59.1 97.675,60.134 ; v1(99.898,143.485) 101.494,143.485 ; v1(100.478,142.469) 101.494,143.485 ; v1(102.357,143.471) 102.357,144.069 ; U28.36@102.357,144.807 102.357,144.069 ; 101.494,143.485 102.078,144.069 102.357,144.069
  IC2 w0.15: v1(80.366,143.392) 81.594,142.164 93.98,142.164 95.301,143.485 v1(99.898,143.485)
  IC3 w0.15: v1(93.167,76.149) 94.971,74.346 94.971,70.51 95.326,70.155 95.326,68.148 96.545,66.929 96.545,61.29 97.688,60.147 97.675,60.134
  BC2 w0.15: v1(83.109,94.869) 83.109,93.447 80.035,90.373 80.035,88.595 80.162,88.468 87.525,88.468 88.447,87.547 88.447,83.359 89.738,82.067 89.738,79.578 v1(93.167,76.149) ; v1(102.357,143.471) 102.357,143.134 103.632,141.859 111.1,141.859 115.113,137.846 139.954,137.846 154.105,123.695 157.175,123.695 U76.D1@159.043,121.827
  BC1 w0.15: v1(83.109,94.869) 86.817,98.577 86.817,106.629 90.932,110.744 90.932,124.968 91.49,125.526 94.926,125.526 95.359,125.959 97.587,125.959 98.019,126.39 98.019,141.834 98.654,142.469 v1(100.478,142.469)
CPU_D10: J15.53 U28.37 U51.18 U61.155 U76.E3 | length 203.7
  FC1 w0.15: J15.53@78.928,142.893 80.5,142.893 80.848,142.545 v1(80.848,142.316) ; v1(80.837,94.437) 80.957,94.557 U61.155@82.028,94.557 82.721,94.513 84.404,94.513 85.718,95.827 85.718,118.567 83.083,121.202 83.083,137.947 83.49,138.354 v1(83.49,139.268) ; U51.18@98.975,59.1 v1(98.975,60.147) ; v1(101.981,143.116) 102.967,143.116 v1(103.157,143.307) U28.37@103.157,144.807
  FC3 w0.15: v1(80.518,68.758) 80.797,69.036 80.797,69.571 81.382,70.156 81.382,84.023 80.848,84.557 80.848,93.066 80.187,93.727 80.187,94.285 80.339,94.437 v1(80.837,94.437)
  IC4 w0.15: v1(80.848,142.316) 83.914,139.25 ; v1(83.49,139.268) 83.508,139.25 83.914,139.25 ; v1(103.157,143.307) 99.101,139.25 83.914,139.25
  BC2 w0.15: v1(101.981,143.116) 101.981,140.157 102.21,139.929 102.641,139.929 103.581,140.868 108.407,140.868 121.641,127.635 141.935,127.635 142.863,126.707 142.863,120.701 143.36,120.205 154.432,120.205 155.626,119.011 155.626,117.624 U76.E3@156.503,116.747
  BC4 w0.15: v1(80.518,68.758) 83.414,65.862 87.376,65.862 93.472,59.766 98.594,59.766 v1(98.975,60.147)
CPU_D11: J15.54 U28.38 U51.17 U61.158 U76.C1 | length 190.9
  FC1 w0.15: J15.54@78.928,142.393 80.147,142.393 v1(80.366,142.392) 80.366,142.174 82.017,140.523 v1(82.017,123.723) ; v1(84.48,89.611) 84.778,89.909 U61.158@84.778,91.807 ; v1(99.009,58.039) 99.365,58.039 99.625,58.299 U51.17@99.625,59.1 ; v1(103.958,143.877) U28.38@103.958,144.807
  FC2 w0.15: v1(80.366,142.392) 80.644,142.671 81.201,142.671 81.479,142.392 92.685,142.392 94.666,144.374 103.461,144.374 v1(103.958,143.877)
  FC3 w0.15: v1(82.017,123.723) 82.017,121.92 85.488,118.448 85.488,102.26 84.887,101.659 84.887,90.018 v1(84.48,89.611)
  IC1 w0.15: v1(87.249,81.153) 87.563,80.839 87.563,80.477 87.859,80.181 87.859,73.584 92.758,68.684 92.758,66.19 98.62,60.328 98.62,59.927 99.009,59.538 v1(99.009,58.039)
  IC3 w0.15: v1(84.48,89.611) 87.249,86.843 v1(87.249,81.153)
  BC2 w0.15: v1(103.958,143.877) 104.149,144.069 111.938,144.069 116.992,139.014 139.446,139.014 153.822,124.638 158.772,124.638 U76.C1@161.583,121.827
CPU_D12: J15.56 U28.40 U51.16 U61.159 U76.G3 | length 192
  FC1 w0.15: J15.56@78.928,141.393 80.356,141.393 ; U61.159@85.278,91.807 v1(85.278,92.887) ; U51.16@100.275,59.1 v1(100.275,60.147) ; v1(105.258,143.535) 105.558,143.835 ; v1(105.558,143.235) 105.558,143.835 ; U28.40@105.558,144.807 105.558,143.835
  FC2 w0.15: 80.356,141.393 80.366,141.402 ; 80.358,141.393 80.366,141.402 ; v1(81.001,93.65) 82.982,91.669 84.06,91.669 v1(85.278,92.887) ; v1(105.258,143.535) 103.708,141.986 100.94,141.986 100.813,142.113 96.316,142.113 96.24,142.037 95.606,142.037 95.53,142.113 81.365,142.113 80.654,141.402 80.366,141.402
  FC3 w0.15: 80.358,141.393 79.985,141.02 79.985,118.948 81.559,117.373 81.559,94.209 v1(81.001,93.65)
  IC1 w0.15: v1(85.278,92.887) 86.649,91.516 87.983,91.516 88.338,91.161 88.338,87.547 88.447,87.438 88.447,85.823 90.399,83.871 90.399,82.305 91.068,81.636 91.068,76.14 92.202,75.006 94.539,75.006 96.368,73.177 96.368,67.615 99.898,64.085 99.898,60.524 v1(100.275,60.147)
  BC4 w0.15: v1(105.558,143.235) 106.218,143.235 106.782,142.672 106.782,137.668 113.487,130.962 144.882,130.962 152.349,123.495 152.349,117.674 U76.G3@151.423,116.747
CPU_D13: J15.57 U28.41 U51.15 U61.160 U76.D2 | length 202.7
  FC1 w0.15: v1(76.378,140.335) 77.107,140.335 77.664,140.892 J15.57@78.928,140.892 ; U61.160@85.778,91.807 85.778,93.347 86.106,93.675 86.411,93.675 v1@86.69,93.396 ; 100.925,57.745 U51.15@100.925,59.1 ; v1@106.35,145.745 v1(105.943,145.745) 106.197,145.491 U28.41@106.358,144.807 v1(106.358,145.738)
  FC2 w0.15: v1(76.378,140.335) 78.486,140.335 78.918,139.903 85.829,139.903 87.048,141.122 ; v1(85.903,140.64) 86.385,141.122 87.048,141.122 ; v1(105.943,145.745) 105.943,142.316 104.75,141.122 87.048,141.122
  FC3 w0.15: v1(85.903,140.64) 85.903,122.301 85.42,121.818 85.42,120.015 86.792,118.643 v1(86.792,93.294) v1@86.69,93.396
  IC1 w0.15: v1(86.792,93.294) 88.671,91.415 88.671,89.611 90.093,88.19 90.093,87.599 91.895,85.796 91.895,79.248 92.149,78.994 95.25,78.994 96.901,77.343 96.901,70.714 97.485,70.129 100.152,70.129 100.321,69.96 100.321,62.814 100.925,62.211 100.925,57.745
  BC4 w0.15: v1@106.35,145.745 v1(106.358,145.738) 108.052,144.043 111.887,144.043 116.078,139.852 138.506,139.852 155.245,123.114 157.277,123.114 157.785,122.606 157.785,120.545 U76.D2@159.043,119.287
CPU_D14: J15.58 U28.42 U51.14 U61.161 U76.K3 | length 174.8
  FC1 w0.15: J15.58@78.928,140.393 v1(81.636,140.393) ; U61.161@86.278,91.807 v1(86.278,93.293) ; U51.14@101.575,59.1 v1(101.575,60.147) ; v1(107.158,142.448) U28.42@107.158,144.807
  FC3 w0.15: v1(81.636,140.393) 82.728,139.3 82.728,121.671 86.278,118.121 v1(86.278,93.293) ; v1(98.346,75.746) 99.06,75.032 99.06,62.662 v1(101.575,60.147)
  IC1 w0.15: v1(86.278,93.293) 86.66,93.675 87.173,93.675 88.925,91.923 88.925,90.023 92.299,86.65 92.299,84.104 93.457,82.946 95.326,82.866 95.326,79.477 98.346,76.457 v1(98.346,75.746)
  IC2 w0.15: v1(81.636,140.393) 82.049,139.979 99.085,139.979 100.736,141.63 106.34,141.63 v1(107.158,142.448)
  IC3 w0.15: v1(107.158,142.448) 109.423,140.183 124.739,140.183 142.291,122.631 142.291,118.259 U76.K3@143.803,116.747
CPU_D15: J15.59 U28.43 U51.13 U61.162 U76.F3 | length 206.6
  FC1 w0.15: v1(77.495,139.903) 77.506,139.892 J15.59@78.928,139.892 ; v1(86.208,89.789) 86.36,89.789 86.994,90.423 86.994,90.703 86.778,90.92 U61.162@86.778,91.807 ; 102.225,58.049 U51.13@102.225,59.1 ; U28.43@107.958,144.807 107.958,144.061 108.306,143.713 109.779,143.713 110.439,143.053 110.439,136.347 ; v1(110.16,136.068) 110.439,136.347 ; v1(110.439,135.103) 110.439,136.347
  FC2 w0.15: v1(77.495,139.903) 77.495,135.763 79.35,133.909 90.195,133.909 90.856,134.569 108.661,134.569 v1(110.16,136.068)
  IC1 w0.15: v1(140.31,134.645) 152.346,122.609 152.346,118.364 U76.F3@153.963,116.747
  IC3 w0.15: v1(94.59,76.733) 95.08,76.733 96.317,75.497 96.317,68.224 98.882,65.659 98.882,64.719 102.235,61.366 102.235,58.039 102.225,58.049
  FC4 w0.15: v1(110.16,136.068) 111.582,134.645 v1(140.31,134.645)
  BC4 w0.15: v1(86.208,89.789) 85.42,89.002 85.42,82.626 86.157,81.89 88.011,81.89 90.844,79.056 92.267,79.056 v1(94.59,76.733)
  BC3 w0.15: v1(86.208,89.789) 85.903,90.094 85.903,94.21 86.029,94.336 86.029,95.097 105.41,114.478 105.41,121.818 109.271,125.679 109.271,133.934 v1(110.439,135.103)
CPU_D16: J15.22 U33.2 U51.82 U61.163 U76.J3 | length 226.6
  FC1 w0.15: v1(72.492,149.893) J15.22@73.928,149.893 ; v1(83.083,89.357) 83.946,90.22 83.946,92.43 83.922,92.455 83.922,93.499 84.614,94.191 86.966,94.191 87.278,94.503 ; U51.82@85.325,28.66 85.325,30.347 ; U61.163@87.278,91.807 87.278,94.503 ; v1(87.278,106.172) 87.278,94.503 ; U33.2@107.938,141.423 107.938,142.342
  FC3 w0.15: v1(83.083,89.357) 82.324,88.597 82.324,85.054 82.22,84.95 82.22,70.363 82.705,69.878 82.705,69.471 83.642,68.534 83.642,57.338 85.325,55.655 85.325,30.347
  IC3 w0.15: 107.952,142.353 109.819,142.353 111.43,140.741 124.689,140.741 142.621,122.809 142.621,118.796 143.053,118.364 144.726,118.364 U76.J3@146.343,116.747
  BC4 w0.15: v1(72.492,149.893) 72.492,150.825 75.246,153.579 78.841,153.579 80.503,151.917 93.65,151.917 100.914,144.653 105.627,144.653 107.938,142.342 ; 107.938,142.342 107.952,142.353 107.95,142.355 107.938,142.342
  BC3 w0.15: v1(87.278,106.172) 87.942,106.172 101.049,119.279 101.049,126.881 108.61,134.442 108.61,141.694 107.952,142.353
CPU_D17: J15.23 U33.3 U51.84 U61.164 U76.D3 | length 229.6
  FC1 w0.15: J15.23@73.928,150.392 v1(76.454,150.392) ; U51.84@86.625,28.66 86.625,27.838 86.854,27.61 ; 87.502,90.474 87.778,90.75 U61.164@87.778,91.807 v1(87.778,108.174) ; v1(107.138,139.66) v1@107.138,140.081 ; v1(107.138,140.086) U33.3@107.138,141.423
  FC3 w0.15: 86.854,27.61 86.97,27.61 87.172,27.812 87.172,30.608 86.866,30.913 86.866,67.134 86.592,67.409 86.592,67.719 87.281,68.409 87.281,79.449 86.515,80.215 86.515,81.528 87.845,82.857 87.845,86.264 87.502,86.607 87.502,90.474
  FC4 w0.15: v1(76.454,150.392) 77.606,149.241 84.871,149.241 85.065,149.047 101.422,149.047 101.448,149.022 101.448,145.771 v1@107.138,140.081
  BC4 w0.15: v1@107.138,140.081 v1(107.138,140.086) 114.295,140.086 116.916,137.465 140.386,137.465 152.679,125.171 152.679,118.894 153.213,118.361 157.429,118.361 U76.D3@159.043,116.747
  BC3 w0.15: v1(87.778,108.174) 88.044,108.174 99.336,119.466 99.336,131.859 v1(107.138,139.66)
CPU_D18: J15.24 U33.4 U51.85 U61.165 U76.C2 | length 222
  FC1 w0.15: J15.24@73.928,150.893 v1(76.31,150.893) ; U51.85@87.275,28.66 v1(87.275,31.622) ; U61.165@88.278,91.807 v1(88.278,96.813) ; v1(106.338,142.367) U33.4@106.338,141.423 106.338,135.039 v1(109.855,131.521)
  FC2 w0.15: v1(109.855,131.521) 118.897,131.521 127.43,122.988 159.66,122.988 160.322,122.326 160.322,120.548 U76.C2@161.583,119.287
  FC3 w0.15: v1(87.275,31.622) 87.096,31.801 87.096,66.827 88.038,67.769 88.038,76.535 88.648,77.145 88.648,81.117 88.075,81.69 88.075,86.494 87.732,86.837 87.732,87.553 88.075,87.896 88.075,92.571 88.278,92.774
  FC4 w0.15: v1(76.31,150.893) 76.81,151.393 77.842,151.393 79.218,150.017 80.687,150.017 80.823,150.154 100.747,150.154 106.338,144.564 v1(106.338,142.367)
  BC3 w0.15: v1(88.278,96.813) 109.144,117.679 109.144,121.158 109.855,121.869 v1(109.855,131.521)
CPU_D19: J15.25 U33.5 U51.87 U61.166 U76.B1 | length 226.9
  FC1 w0.15: J15.25@73.928,151.392 v1(75.895,151.392) ; U51.87@88.575,28.66 v1(88.575,29.713) ; 88.778,104.821 U61.166@88.778,91.807 88.778,90.132 88.672,90.026 88.672,89.108 v1(89.048,88.731) ; v1(105.538,140.487) U33.5@105.538,141.423
  FC2 w0.15: v1(105.538,140.487) 109.042,140.487 110.719,138.811 128.143,138.811 142.316,124.638 161.312,124.638 U76.B1@164.123,121.827
  FC3 w0.15: v1(88.575,29.713) 88.29,29.997 88.29,61.637 88.723,62.07 88.723,67.336 89.108,67.721 89.108,81.667 89.128,81.687 89.128,87.012 89.251,87.135 89.251,88.528 v1(89.048,88.731)
  FC4 w0.15: v1(75.895,151.392) 75.895,149.403 76.32,148.978 83.28,148.978 83.947,148.311 99.771,148.311 101.016,147.066 101.016,142.24 101.27,141.986 104.039,141.986 v1(105.538,140.487)
  BC1 w0.15: 88.778,104.821 88.773,104.826 98.336,114.389 98.336,122.03 99.039,122.733 99.039,131.729 105.538,138.227 v1(105.538,140.487)
CPU_D20: J15.27 U33.7 U51.88 U61.167 U76.A1 | length 237.6
  FC1 w0.15: J15.27@73.928,152.392 v1(75.362,152.392) ; v1(89.225,27.61) U51.88@89.225,28.66 ; U61.167@89.278,91.807 89.278,92.682 v1(89.484,92.888) ; v1(102.184,139.217) 103.456,140.488 v1(103.938,140.488) U33.7@103.938,141.423
  FC3 w0.15: v1(89.225,27.61) 88.87,27.255 86.766,27.255 86.131,27.89 86.131,39.751 86.462,40.081 86.462,64.821 85.319,65.964 85.319,67.996 85.293,68.021 85.293,81.307 84.532,82.068 84.532,84.988 86.792,87.248 86.792,92.583 87.808,93.599 89.916,93.599 90.195,93.878 ; v1(89.484,92.888) 90.195,93.599 90.195,93.878 ; v1(102.184,139.217) 95.512,132.544 95.512,123.169 95.692,122.989 95.692,119.879 95.479,119.666 95.479,99.645 90.195,94.361 90.195,93.878
  IC1 w0.15: v1(103.938,140.488) 116.002,128.422 117.094,128.422 v1(122.25,123.266)
  FC4 w0.15: v1(122.25,123.266) 122.758,122.758 165.732,122.758 U76.A1@166.663,121.827
  BC4 w0.15: v1(75.362,152.392) 75.87,152.901 75.87,153.223 75.997,153.349 76.377,153.349 78.689,151.037 84.167,151.037 90.729,144.475 99.949,144.475 v1(103.938,140.488)
CPU_D21: J15.28 U33.8 U51.89 U61.168 U76.B2 | length 228.1
  FC1 w0.15: v1(72.492,152.893) J15.28@73.928,152.893 ; v1(87.782,47.574) 89.875,45.482 U51.89@89.875,28.66 ; v1(89.372,90.727) 89.575,90.727 89.778,90.93 U61.168@89.778,91.807 ; U33.8@103.138,141.423 103.138,142.254 v1(103.581,142.697)
  FC2 w0.15: v1(114.859,122.403) 123.8,122.403 125.324,120.879 134.595,120.879 134.925,120.548 134.925,118.77 135.331,118.364 163.199,118.364 U76.B2@164.123,119.287
  FC3 w0.15: v1(87.782,47.574) 87.326,48.03 87.326,65.991 88.29,66.954 88.29,76.327 88.878,76.915 88.878,81.376 88.447,81.807 88.447,89.945 89.129,90.627 v1@89.475,90.627
  IC1 w0.15: v1(103.581,142.697) 103.581,139.675 114.859,128.397 v1(114.859,122.403)
  BC2 w0.15: v1(72.492,152.893) 72.948,153.349 78.699,153.349 79.827,154.478 84.968,154.478 91.034,148.412 98.958,148.412 103.581,143.789 v1(103.581,142.697)
  BC3 w0.15: v1(89.372,90.727) 89.891,91.246 ; v1@89.475,90.627 89.891,91.043 89.891,91.246 ; v1(114.859,122.403) 112.827,122.403 111.531,121.107 111.531,118.788 110.659,117.915 109.788,117.915 89.891,98.018 89.891,91.246
CPU_D22: J15.29 U33.9 U51.90 U61.169 U76.A2 | length 258.9
  FC1 w0.15: J15.29@73.928,153.392 75.16,153.392 75.565,153.797 v1(75.565,154) ; v1(89.535,94.01) 90.278,93.267 U61.169@90.278,91.807 ; v1(90.525,27.609) U51.90@90.525,28.66 ; v1(102.338,140.492) U33.9@102.338,141.423
  FC3 w0.15: v1(75.565,154) 75.768,153.797 78.486,153.797 81.533,150.75 ; v1(81.28,87.808) 81.864,87.224 ; v1(90.525,27.609) 89.941,27.025 85.167,27.025 84.658,27.534 84.658,50.244 83.541,51.361 83.541,54.635 82.905,55.271 82.905,66.574 81.711,67.768 81.711,85.384 81.864,85.536 81.864,87.224 ; v1(102.338,140.492) 101.977,140.132 94.082,140.132 93.722,139.772 92.511,139.772 81.533,150.75 ; 81.533,150.75 81.533,142.279 80.721,141.466 80.721,128.177 80.499,127.954 80.499,119.577 81.89,118.186 81.89,91.618 81.864,91.592 81.864,87.224
  IC2 w0.15: v1(81.28,87.808) 81.28,90.81 84.479,94.01 v1(89.535,94.01)
  BC2 w0.15: v1(102.338,140.492) 102.993,141.148 108.509,141.148 116.383,133.274 143.866,133.274 155.592,121.547 155.592,120.684 156.058,120.218 165.732,120.218 U76.A2@166.663,119.287
CPU_D23: J15.30 U33.10 U51.91 U61.170 U76.A4 | length 251.5
  FC1 w0.15: v1(72.136,153.893) J15.30@73.928,153.893 ; U61.170@90.778,91.807 90.778,90.324 v1(90.932,90.17) ; U51.91@91.175,28.66 91.175,29.91 ; v1(101.538,136.017) U33.10@101.538,141.423 v1(101.538,142.353)
  FC2 w0.15: v1(90.932,90.17) 91.389,90.17 v1(95.098,93.878)
  FC3 w0.15: v1(95.098,93.878) 95.098,95.072 96.698,96.672 96.698,125.903 101.168,130.373 101.168,135.648 v1(101.538,136.017)
  IC3 w0.15: v1(90.932,90.17) 90.932,85.306 92.659,83.578 94.7,83.578 96.698,81.581 96.698,68.783 104.343,61.138 104.343,53.492 v1(99.238,48.387)
  BC2 w0.15: v1(72.136,153.893) 72.136,152.603 72.339,152.4 74.066,152.4 74.574,151.892 76.175,151.892 76.937,152.654 78.892,152.654 80.486,154.248 81.585,154.248 88.36,147.472 96.418,147.472 v1(101.538,142.353)
  BC4 w0.15: v1(101.538,142.353) 116.433,127.457 145.44,127.457 150.165,122.733 150.165,116.23 150.571,115.824 165.046,115.824 U76.A4@166.663,114.207
  BC1 w0.15: 91.175,29.91 91.186,29.921 91.186,40.335 v1(99.238,48.387)
CPU_D24: J15.32 U33.35 U51.92 U61.171 U76.A6 | length 240.2
  FC1 w0.15: J15.32@78.928,153.392 v1(80.366,153.392) ; v1(90.729,94.005) 90.729,93.783 91.278,93.233 U61.171@91.278,91.807 ; U51.92@91.825,28.66 91.825,30.886 91.542,31.17 91.542,55.423 v1(92.989,56.871) ; v1(99.494,133.121) v1(101.538,131.078) ; v1(99.494,133.121) v1(101.538,131.078) ; U33.35@101.538,130.148 v1(101.538,131.078) ; v1(166.649,131.343) 166.649,123.469 165.735,122.555 165.735,110.055 U76.A6@166.663,109.127
  IC3 w0.15: v1(80.366,153.392) 80.366,152.173 89.559,142.979 89.559,139.575 96.012,133.121 v1(99.494,133.121) ; v1(90.729,94.005) 90.729,92.998 88.447,90.715 88.447,83.74 89.128,83.059 89.128,76.549 91.11,74.567 91.11,70.1 91.77,69.44 91.77,60.122 92.304,59.588 92.304,57.556 v1(92.989,56.871)
  FC4 w0.15: v1(101.538,131.078) 102.667,132.207 165.786,132.207 v1(166.649,131.343)
  BC1 w0.15: v1(90.729,94.005) 90.729,102.692 98.566,110.53 98.566,121.756 99.269,122.459 99.269,128.809 v1(101.538,131.078)
  other v1: 99.494,133.121
CPU_D25: J15.33 U33.36 U51.93 U61.172 U76.B6 | length 232.8
  FC1 w0.15: v1(76.225,152.893) J15.33@78.928,152.893 ; 91.778,89.866 U61.172@91.778,91.807 91.778,93.059 91.135,93.702 91.135,95.072 93.472,97.409 93.472,119.738 93.193,120.018 v1(93.193,120.32) ; U51.93@92.475,28.66 v1(92.475,32.741) ; v1(102.338,129.217) U33.36@102.338,130.148
  IC2 w0.15: v1(93.193,120.32) 94.843,121.97 94.843,123.342 99.289,127.787 100.907,127.787 v1(102.338,129.217)
  IC3 w0.15: 91.778,89.866 91.719,89.808 91.719,89.401 95.479,85.642 95.479,83.642 100.127,78.993 100.127,70.586 v1(104.546,66.167)
  BC2 w0.15: v1(102.338,129.217) 103.168,130.048 104.191,130.048 110.134,124.104 119.177,124.104 124.917,118.364 154.102,118.364 155.575,116.891 155.575,115.824 161.011,110.388 162.862,110.388 U76.B6@164.123,109.127
  BC4 w0.15: v1(76.225,152.893) 76.225,152.588 76.81,152.003 76.81,149.275 79.172,146.914 82.499,146.914 83.591,145.821 83.591,140.513 84.125,139.979 86.639,139.979 97.401,129.217 v1(102.338,129.217)
  BC3 w0.15: v1(92.475,32.741) 92.475,47.009 104.546,59.08 v1(104.546,66.167)
CPU_D26: J15.34 U33.37 U51.94 U61.173 U76.C7 | length 226.4
  FC1 w0.15: J15.34@78.928,152.392 80.383,152.392 v1(80.924,152.933) ; v1(91.516,94.213) 91.516,93.646 92.278,92.884 U61.173@92.278,91.807 ; U51.94@93.125,28.66 93.125,32.605 91.796,33.934 91.796,54.889 93.345,56.439 v1(93.345,57.302) ; U33.37@103.138,130.148 v1(103.138,131.078)
  IC3 w0.15: v1(91.516,94.213) 91.516,92.023 89.612,90.119 89.612,84.708 91.313,83.007 91.313,75.59 92.146,74.757 92.146,70.127 92.758,69.515 92.758,61.267 93.345,60.681 v1(93.345,57.302)
  BC2 w0.15: v1(80.924,152.933) 79.982,151.991 79.982,144.3 85.344,138.938 92.253,138.938 97.18,134.01 100.205,134.01 v1(103.138,131.078)
  BC4 w0.15: v1(103.138,131.078) 116.207,118.008 139.446,118.008 140.005,117.45 140.005,111.379 144.796,106.587 U76.C7@161.583,106.587
  BC1 w0.15: v1(91.516,94.213) 91.516,102.845 98.796,110.125 98.796,119.7 99.499,120.404 99.499,127.44 v1(103.138,131.078)
CPU_D27: J15.35 U33.38 U51.95 U61.174 U76.C6 | length 236
  FC1 w0.15: v1(77.165,151.951) 77.224,151.893 J15.35@78.928,151.893 ; 92.778,90.534 U61.174@92.778,91.807 ; U51.95@93.775,28.66 93.775,29.716 ; v1(103.938,129.217) U33.38@103.938,130.148 v1(103.938,131.723)
  FC3 w0.15: v1(103.938,129.217) 105.126,128.029 105.126,119.359 106.223,118.262 v1(106.223,94.539)
  IC1 w0.15: 92.735,90.475 92.735,88.722 94.259,87.198 94.259,86.182 93.904,85.827 93.904,84.861 94.736,84.029 96.362,84.029 100.869,79.521 100.869,62.656 101.219,62.306 101.219,58.547 102.794,56.972 105.918,56.972 106.401,56.49 106.401,42.342 93.775,29.716
  FC4 w0.15: 92.735,90.475 92.786,90.526 ; 92.778,90.534 92.786,90.526 ; v1(106.223,94.539) 98.919,94.539 96.582,92.202 94.463,92.202 92.786,90.526
  BC2 w0.15: v1(103.938,129.217) 109.411,123.744 116.49,123.744 124.765,115.468 155.242,115.468 U76.C6@161.583,109.127
  BC4 w0.15: v1(77.165,151.951) 78.309,150.807 81.984,150.807 89.789,143.002 89.789,138.414 90.221,137.982 92.599,137.982 98.858,131.723 v1(103.938,131.723)
CPU_D28: J15.37 U33.40 U51.96 U61.175 U76.C8 | length 235.8
  FC1 w0.15: v1(77.495,150.901) 77.504,150.893 J15.37@78.928,150.893 ; U61.175@93.278,91.807 v1(93.278,93.09) ; U51.96@94.425,28.66 v1(94.425,31.191) ; v1(105.538,126.848) U33.40@105.538,130.148
  FC3 w0.15: v1(93.278,93.09) 90.372,90.184 90.372,88.212 89.942,87.782 89.942,83.668 89.611,83.337 89.611,70.485 90.754,69.342 90.754,61.824 90.221,61.29 90.221,31.598 90.627,31.191 v1(94.425,31.191)
  FC4 w0.15: v1(93.278,93.09) 93.278,94.319 93.878,94.92 111.303,94.92 116.662,100.279 116.662,100.736 118.974,103.048 145.797,103.048 146.127,102.718 146.634,102.718 146.964,103.048 160.583,103.048 U76.C8@161.583,104.047
  BC4 w0.15: v1(77.495,150.901) 79.375,149.022 82.779,149.022 87.63,144.17 87.63,139.37 95.352,131.648 98.146,131.648 99.695,130.099 102.286,130.099 ; 102.286,130.099 102.49,130.099 105.538,127.051 v1(105.538,126.848) 102.286,130.099
  BC1 w0.15: v1(93.278,93.09) 93.278,98.714 103.937,109.372 103.937,126.39 104.394,126.848 v1(105.538,126.848)